# Altium PCB Pcb1.PcbDoc
Units mm, origin at the board's own origin, x right, y up, seen from the top; angles counter-clockwise.
Board outline 21.82 x 37.52 mm, 2 copper layers (Top Layer, Bottom Layer), stack 1.569 mm thick; 24 components, 18 nets, 68 pads, 72 vias.
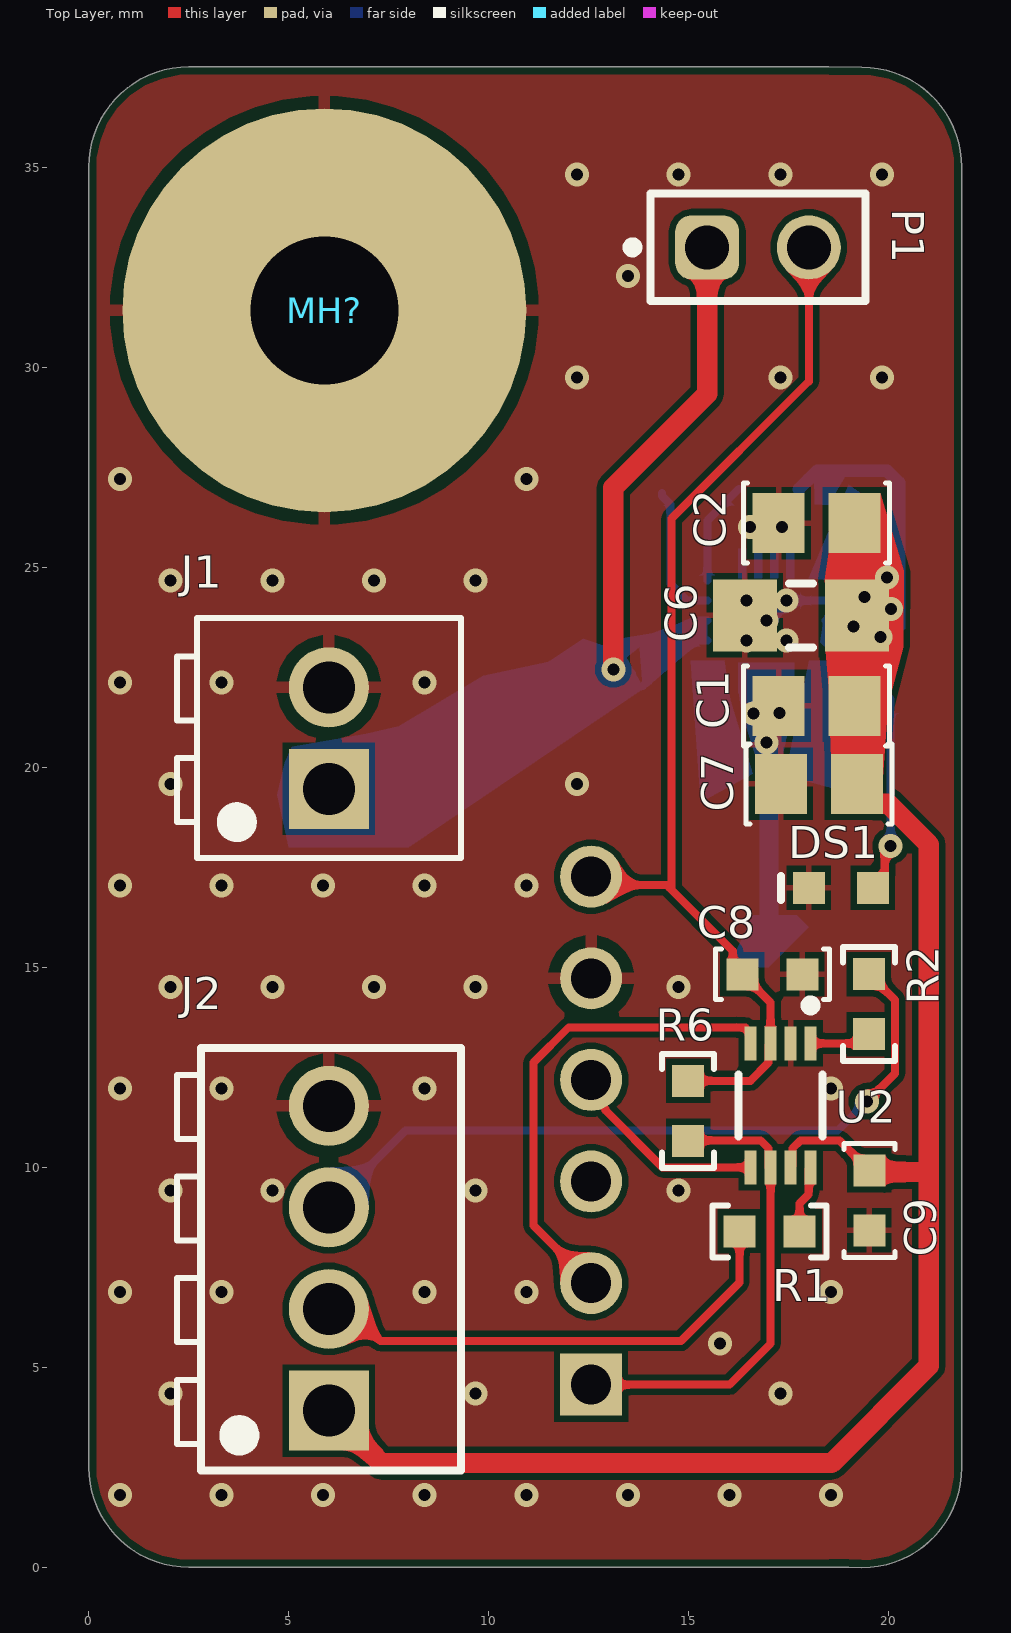
[diagram p0: Top Layer view]
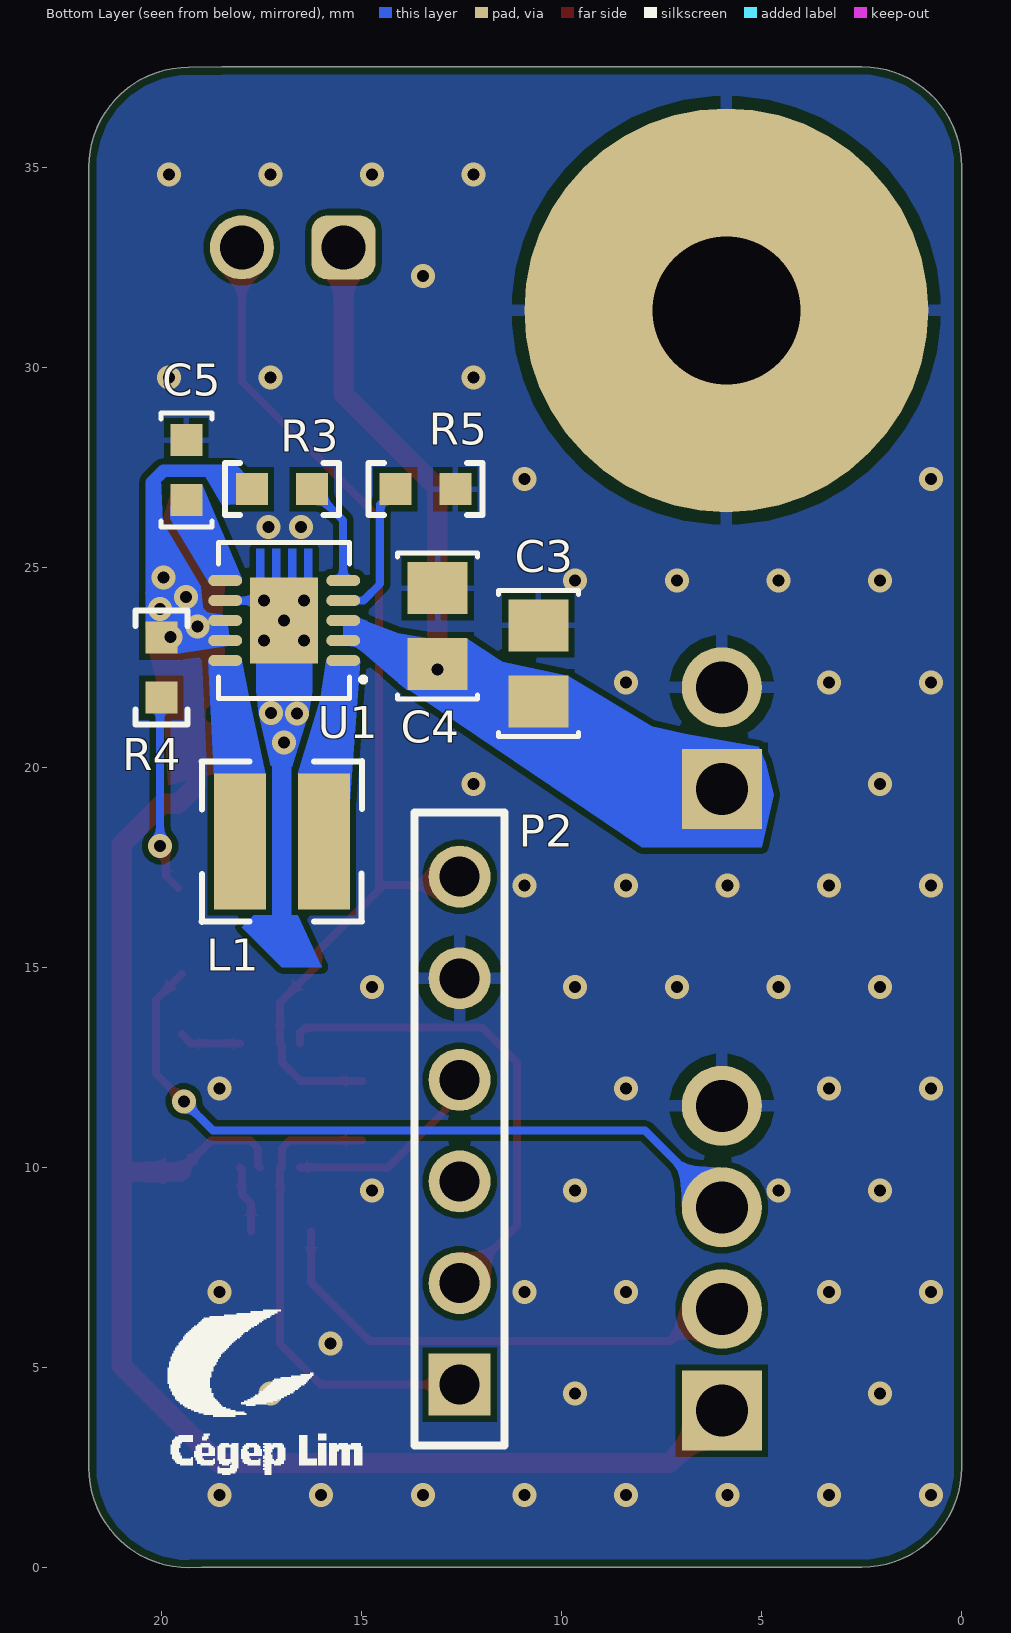
[diagram p1: Bottom Layer view, seen from below]
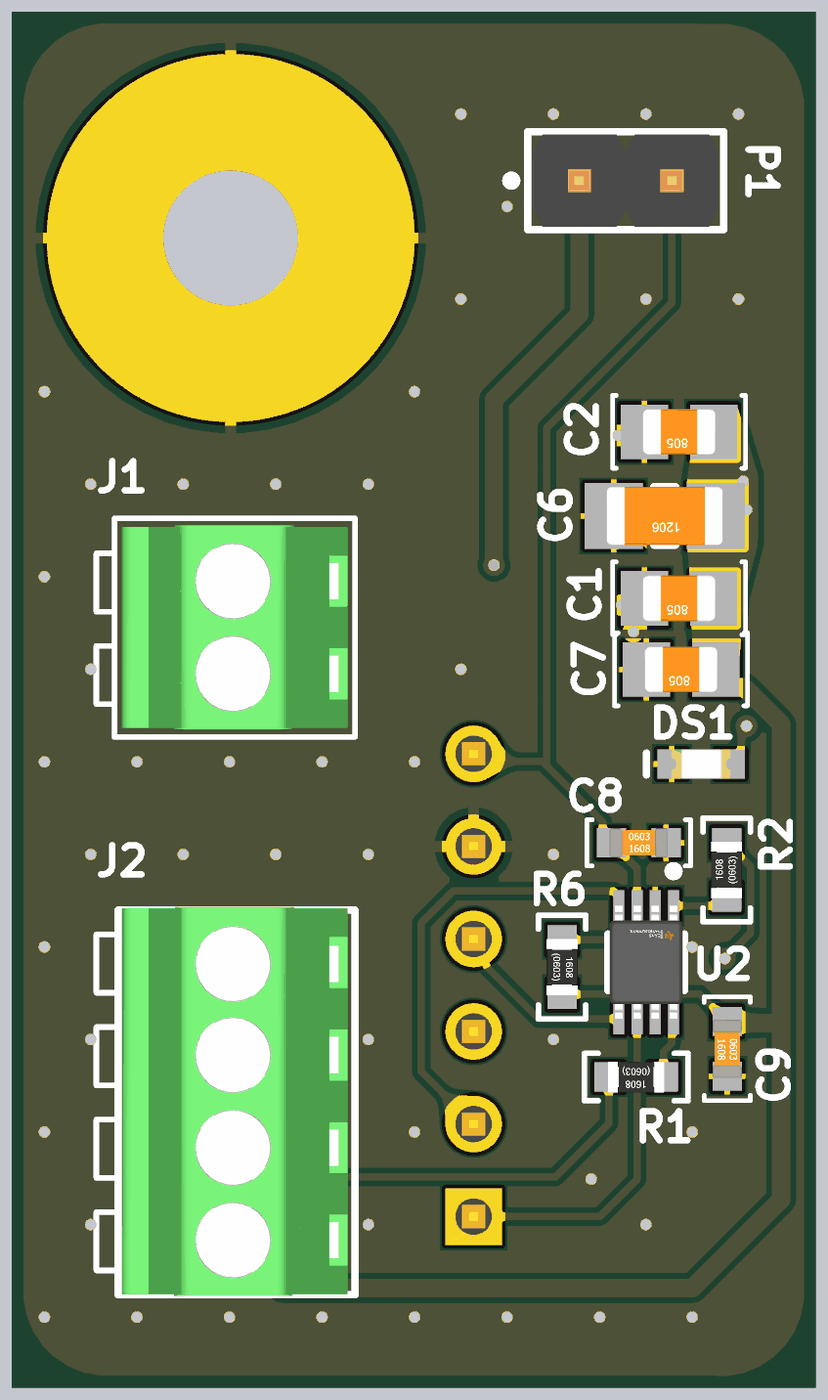
[diagram p2: 3D render of the assembled board from above, using the file's embedded part models]
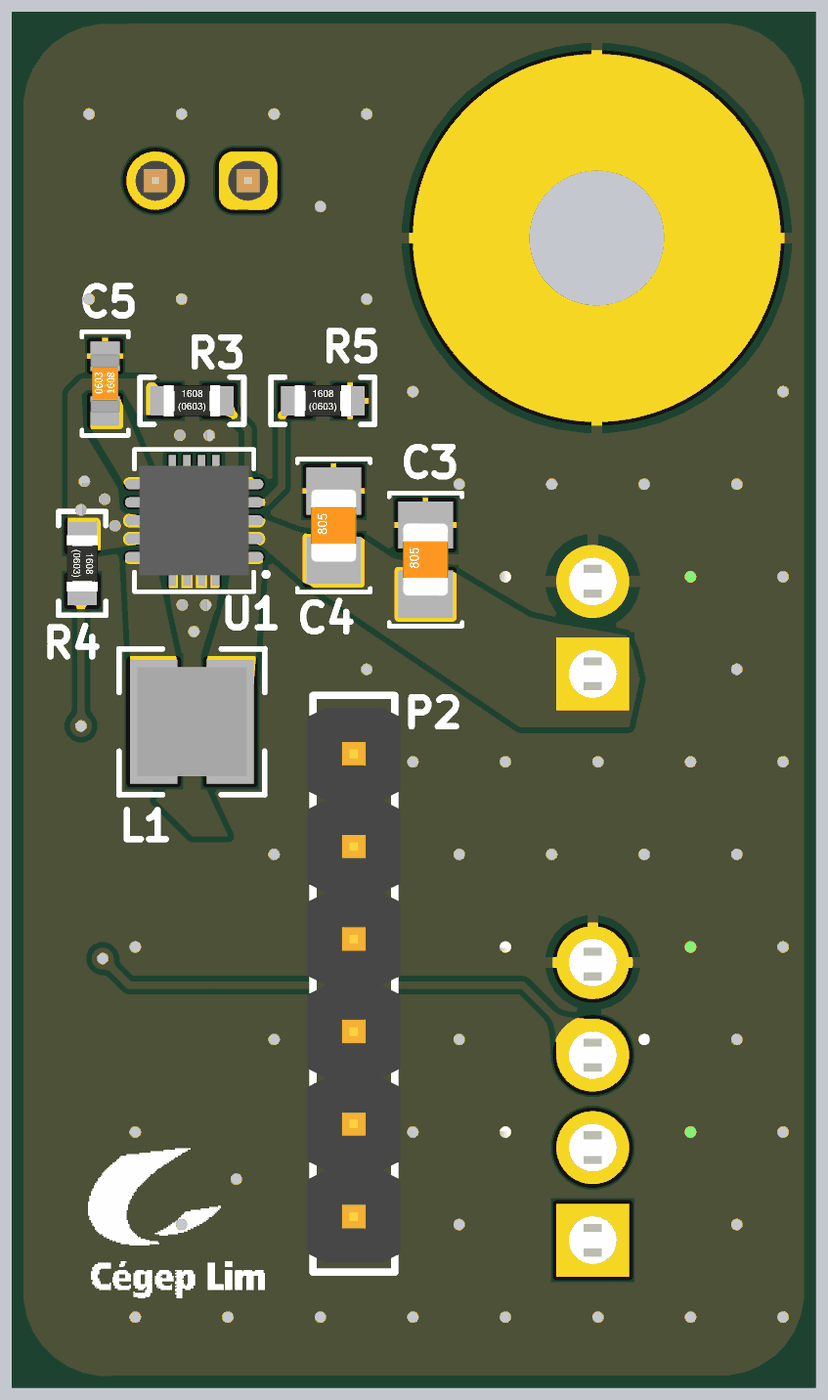
[diagram p3: 3D render of the assembled board from below, using the file's embedded part models]

## Layer stack, top to bottom
Top Solder: solder mask 0.0254, SM-001, Dk 4
Top Layer: signal copper 0.035
Dielectric 1: core 1.4986, Core-043, Dk 4.3
Bottom Layer: signal copper 0.035
Bottom Solder: solder mask 0.0254, SM-001, Dk 4

## Board outline
2.5,0.003 cw(c2.5,2.503) 0,2.503 0,35.014 cw(c2.5,35.014) 2.5,37.514 18.5,37.514 19.325,37.503 cw(c19.325,35.003) 21.825,35.003 21.825,2.492 cw(c19.325,2.492) 19.325,-0.008 19,0 18.5,0.003

## Design rules (kind name [scope] priority, off if disabled: settings)
BoardOutlineClearance [All] p1: gap=0.2 ignorepadtopadclearanceinfootprint=FALSE
Clearance [All] p1: gap=0.15 ignorepadtopadclearanceinfootprint=FALSE
DiffPairsRouting [All] p1: maxlimit=0.125 minlimit=0.125 mostfreqgap=0.125 toplayer_minwidth=0.125 toplayer_maxwidth=0.125 toplayer_prefwidth=0.125 bottomlayer_minwidth=0.125 bottomlayer_maxwidth=0.125 bottomlayer_prefwidth=0.125 maxuncoupledlength=15
HoleSize [All] p1: absolutevalues=TRUE maxlimit=5 minlimit=0.2 maxpercent=80.000 minpercent=20.000
HoleToHoleClearance [All] p1: gap=0.3 allowstackedmicrovias=TRUE
MinimumSolderMaskSliver [All] p1: minsoldermaskwidth=0.005
PlaneClearance [All] p1: clearance=0.5
PlaneConnect [All] p1: pad.planeconnectstyle=Relief pad.reliefexpansion=0.508 pad.reliefentries=4 pad.reliefconductorwidth=0.254 pad.reliefairgap=0.15 via.planeconnectstyle=Direct via.reliefexpansion=0.508 via.reliefentries=4 via.reliefconductorwidth=0.254 via.reliefairgap=0.254
PolygonConnect [All] p1: thpad.connectstyle=Relief thpad.reliefconductorwidth=0.3 thpad.reliefentries=4 thpad.polygonreliefangle="90 Angle" thpad.airgapwidth=0.3 smdpad.connectstyle=Relief smdpad.reliefconductorwidth=0.15 smdpad.reliefentries=4 smdpad.polygonreliefangle="90 Angle" smdpad.airgapwidth=0.15 via.connectstyle=Direct via.reliefconductorwidth=0.254 via.reliefentries=4 via.polygonreliefangle="90 Angle" via.airgapwidth=0.254
RoutingVias [All] p1: holewidth=0.3 width=0.6 viastyle="Through Hole" minholewidth=0.3 minwidth=0.6 maxholewidth=0.7 maxwidth=1.2
SilkToSilkClearance [All] p1: silktosilkclearance=0
SilkToSolderMaskClearance [IsPad] p1: minsilkscreentomaskgap=0 clearancetoexposedcopper=TRUE
SolderMaskExpansion [All] p1: expansion=0.102 istentingtop=FALSE
Width [All] p1: maxlimit=5 minlimit=0.15 preferedwidth=0.2
22 further rules are at their usual default settings.

## Classes and differential pairs
component class U_PMOD-Type2-SPI: P2
component class U_Level-Translator: C8 C9 R6 U2
component class U_Buck-Boost-5V: C3 C4 C5 C6 C7 DS1 L1 R3 R4 R5 U1
component class BUS: C1 C2 J1 J2 MH? P1 R1 R2

## Components (designator, comment, footprint, x,y, rotation, side; value= is the part's Value field where it differs from the comment)
C1 "CAP CER 10uF 10V X?? 0805" C_2012[0805] 18.194,21.536 r180 top value=10u
C2 "CAP CER 100nF 50V 0805" C_2012[0805] 18.194,26.105 r180 top locked value=100n
C3 "CAP CER 10uF 10V X?? 0805" C_2012[0805] 10.588,22.599 r90 bottom locked value=10u
C4 "CAP CER 10uF 10V X?? 0805" C_2012[0805] 13.108,23.532 r90 bottom locked value=10u
C5 "CAP CER 100nF 50V 0603" C_1608[0603] 19.384,27.43 r90 bottom value=100n
C6 "CAP CER 100uF 10V 1206" C_3216[1206] 17.801,23.797 r180 top value=100u
C7 "CAP CER 10uF 10V X?? 0805" C_2012[0805] 18.249,19.586 r180 top value=10u
C8 "CAP CER 100nF 50V 0603" C_1608[0603] 17.089,14.826 r0 top value=100n
C9 "CAP CER 100nF 50V 0603" C_1608[0603] 19.515,9.173 r270 top value=100n
DS1 "XL-1608UGC-04" D_LED_0603 18.801,16.989 r0 top value=Green
J1 "CONN-2MM54-2POS-TERM-BLOCK" CONN_TERM_BLOCK_2POS_100MIL 6,20.73 r90 top locked
J2 "CONN-2MM54-4POS-TERM-BLOCK" CONN_TERM_BLOCK_4POS_100MIL 6,7.73 r90 top locked
L1 "Inductor 1UH 1.6A 51mΩ SMD" L_3030[1212] 17,18.147 r0 bottom value=1u
MH? "DNP" MP_M-Hole_#4-40_LOOSE-FIT 5.888,31.426 r0 top
P1 "61300211121" CONN_HDR_2POS_100MILS_TH 16.73,33 r0 top
P2 "ZX-PZ2.54-1-6PZZ" CONN_HDR_01X06_100MIL 12.557,10.918 r90 bottom locked
R1 "Res 100R 1% 0603" R_1608[0603] 17.018,8.399 r180 top value=100R
R2 "Res 100R 1% 0603" R_1608[0603] 19.501,14.082 r90 top value=100R
R3 "Res 100k 1% 0603" R_1608[0603] 17,26.956 r180 bottom value=100k
R4 "Res 1k 1% 0603" R_1608[0603] 20.012,22.493 r270 bottom value=1k
R5 "Res 100k 1% 0603" R_1608[0603] 13.409,26.956 r180 bottom value=100k
R6 "Res 100k 1% 0603" R_1608[0603] 14.984,11.416 r270 top value=100k
U1 "TPS63061DSCR" U_WSON50P300X300X80-10N 16.941,23.671 r270 bottom locked
U2 "TXU0102DCUR" U_VSSOP50P310X200X90-8N 17.292,11.548 r90 top

## Footprints (in the part's own frame and the unit in brackets; to place one, negate y for a bottom-side part, rotate by r counter-clockwise, add the part's x,y. Pads: shape width x height; smd on the part's side, far side on the other; paste and mask are expansions set on the pad)
C_1608[0603] [mm] "Capacitor MLCC; Body 1.6 x 0.8 mm (LxW typ)"
  rect 0.8x0.8 smd: 1(-0.75,0) 2(0.75,0)
  silkscreen extent -1.43,-0.64 1.43,0.64, body extent -0.8,-0.4 0.8,0.4, height 0.8
C_2012[0805] [mm] "Capacitor MLCC; Body 2.0 x 1.3 mm (LxW typ)"
  rect 1.3x1.5 smd: 1(-0.95,0) 2(0.95,0)
  silkscreen extent -1.83,-1 1.83,1, body extent -1,-0.62 1,0.63, height 0.78
C_3216[1206] [mm] "Capacitor MLCC; Body 3.2 x 1.6 mm (LxW typ)"
  rect 1.6x1.8 smd: 1(-1.4,0) 2(1.4,0)
  silkscreen extent -0.3,-0.8 0.3,0.8, body extent -1.6,-0.8 1.6,0.8, height 1
CONN_HDR_01X06_100MIL [mm] "Header, 1x6 Pins, 2.54mm Pitch"
  rect 1.55x1.55 hole 1: 1(-6.35,0)
  round 1.55 hole 1: 2(-3.81,0) 3(-1.27,0) 4(1.27,0) 5(3.81,0) 6(6.35,0)
  silkscreen extent -7.87,-1.12 7.95,1.12, body extent -7.62,-1.27 7.62,1.27, height 8.57
CONN_HDR_2POS_100MILS_TH [mm] "Pin Header, pitch 2.54 mm, THT, Vertical, single row, 2p"
  rrect50% 1.6x1.6 hole 1.1: 1(-1.27,0)
  round 1.6 hole 1.1: 2(1.27,0)
  silkscreen extent -3.26,-1.35 2.69,1.35, body extent -2.54,-1.27 2.54,1.27, height 8.57
CONN_TERM_BLOCK_2POS_100MIL [mm] "2.54 mm Horizontal Entry Modular, 2 positions"
  rect 2x2 hole 1.3 paste-2539.97 mask+0: 1(-1.27,0)
  round 2 hole 1.3 paste-2539.97 mask+0: 2(1.27,0)
  silkscreen extent -3,-3.3 3,3.8, body extent -2.79,-3.1 2.81,3.1, height 8.53
CONN_TERM_BLOCK_4POS_100MIL [mm] "2.54 mm Horizontal Entry Modular, 4 positions"
  rect 2x2 hole 1.3: 1(-3.81,0)
  round 2 hole 1.3: 2(-1.27,0) 3(1.27,0) 4(3.81,0)
  silkscreen extent -5.31,-3.3 5.25,3.8, body extent -5.34,-3.1 5.34,3.1, height 8.5
D_LED_0603 [mm] "Chip LED, 2-Leads, Body 1.6x0.8mm, IPC Medium Density"
  rect 0.8x0.8 smd: 1(-0.8,0) 2(0.8,0)
  silkscreen extent -1.5,-0.3 -1.5,0.3, body extent -0.8,-0.4 0.8,0.4, height 0.7
L_3030[1212] [mm] "Inductor, 2-Leads, Body 3,00x3,00mm"
  rect 1.3x3.4 smd: 1(-1.05,0) 2(1.05,0)
  silkscreen extent -2.01,-2.01 2.01,2.01, body extent -1.5,-1.5 1.5,1.5, height 1.5
MP_M-Hole_#4-40_LOOSE-FIT [mm] "Monting Hole #4-40 Loose Fit"
  round 10.1 hole 3.7 paste-2539.97: 1(0,0)
R_1608[0603] [mm] "Chip Resistor; Body 1.6 x 0.8 mm (LxW typ)"
  rect 0.8x0.8 smd: 1(-0.75,0) 2(0.75,0)
  silkscreen extent -1.43,-0.65 1.43,0.65, body extent -0.77,-0.42 0.78,0.43, height 0.45
U_VSSOP50P310X200X90-8N [mm]
  rect 0.85x0.3 smd: 1(1.55,-0.75) 2(1.55,-0.25) 3(1.55,0.25) 4(1.55,0.75) 5(-1.55,0.75) 6(-1.55,0.25) 7(-1.55,-0.25) 8(-1.55,-0.75)
  silkscreen extent -0.78,-1.05 2.62,1.05, body extent -2.05,-1.3 2.05,1.3, height 0.25
U_WSON50P300X300X80-10N [mm]
  oval 0.28x0.85 smd paste+0 mask+0.051: 1(1,1.475) 2(0.5,1.475) 3(0,1.475) 4(-0.5,1.475) 5(-1,1.475) 6(-1,-1.475) 7(-0.5,-1.475) 8(0,-1.475) 9(0.5,-1.475) 10(1,-1.475)
  rect 2.15x1.7 smd paste-1.062 mask+0.051: 11(0,0)
  Top Layer region: -1.8,-0.3 -1.06,-0.3 -1.06,-0.1 -1.8,-0.1
  Top Layer region: -1.06,0.3 -1.8,0.3 -1.8,0.1 -1.06,0.1
  Top Layer region: -1.8,-0.7 -1.06,-0.7 -1.06,-0.5 -1.8,-0.5
  Top Layer region: 1.8,0.3 1.06,0.3 1.06,0.1 1.8,0.1
  Top Layer region: 1.06,-0.7 1.8,-0.7 1.8,-0.5 1.06,-0.5
  Top Layer region: 1.06,-0.3 1.8,-0.3 1.8,-0.1 1.06,-0.1
  Top Layer region: -1.06,0.7 -1.8,0.7 -1.8,0.5 -1.06,0.5
  Top Layer region: 1.8,0.7 1.06,0.7 1.06,0.5 1.8,0.5
  silkscreen extent -1.95,-1.64 1.95,2.04, body extent -1.5,-1.5 1.5,1.5, height 0.77

## Part data
C1 C3 C4 C7: library part CAP026, "Capacitor type 1", Rated Voltage=10V, Code CEGEP=KCOND94SM, LibRef=CAP026, Localisation=R13-C015-3, Mounting Technology=SMT
C2: library part CAP008, "Capacitor type 1", Dielectric=X7R, Manufacturer 1=Yageo, Manufacturer Part Number 1=CC0805KRX7R9BB104, Rated Voltage=50V, Supplier Part Number 1=C49678, Tolerance=10%, Code CEGEP=KCOND0142SM, LibRef=CAP008, Mounting Technology=SMT, Supplier 1=LCSC
C5 C8 C9: library part CAP002, "Capacitor type 1", Dielectric=X7R, Manufacturer 1=Yageo, Manufacturer Part Number 1=CC0603KRX7R9BB104, Rated Voltage=50V, Supplier Part Number 1=C14663, Tolerance=10%, Code CEGEP=COND0143SM, LibRef=CAP002, Mounting Technology=SMT, Supplier 1=LCSC
C6: library part CAP005, "Capacitor type 1", Dielectric=X5R, Manufacturer 1=Murata, Manufacturer Part Number 1=GRM31CR61A107MEA8L, Rated Voltage=10V, Supplier Part Number 1=C883598, Tolerance=20%, Code CEGEP=KCOND04SM, LibRef=CAP005, Mounting Technology=SMT, Supplier 1=LCSC
DS1: library part D_LED_GREEN_0603, "LED Green Clear 40mcd 140deg", Manufacturer 1=XINGLIGHT, Manufacturer 2=Wurth, Manufacturer Part Number 2=150060VS75000, Supplier Part Number 1=C965804, Code CEGEP=KLEDVC0603, Manufacturer Part Number 1=XL-1608UGC-04, Mounting Technology=SMT, Supplier 1=LCSC, Supplier 2=Digikey, Supplier Part Number 2=732-4980-1-ND
J1: "CONN TERM BLOCK 2POS 100mil pitch", Manufacturer 1=Dorabo, Manufacturer 2=Amphenol, Manufacturer Part Number 1=DB125-2.54-2P-GN-S, Manufacturer Part Number 2=VN02A1500000G, Supplier Part Number 1=C918120, Mounting Technology=TH, Supplier 1=LCSC, Supplier 2=Digikey, Supplier Part Number 2=VN02A1500000G-ND
J2: "CONN TERM BLOCK 4POS 100mil pitch", Manufacturer 1=Dorabo, Manufacturer 2=Amphenol, Manufacturer Part Number 1=DB125-2.54-4P-GN-S, Manufacturer Part Number 2=VN04A1500000G, Supplier Part Number 1=C918122, Mounting Technology=TH, Supplier 1=LCSC, Supplier 2=Digikey, Supplier Part Number 2=VN04A1500000G-ND
L1: library part IND001, "Inductor type 1", Manufacturer 1=Murata, Manufacturer Part Number 1=LQH3NPN1R0MMEL, Saturation Current=2.35A, Supplier Part Number 1=C703777, Tolerance=25%, Code CEGEP=KPTSO09, DCR=0R025, LibRef=IND001, Mounting Technology=SMT, Supplier 1=LCSC
MH?: library part MH-4-40, "Mounting Hole #4-40 w/ Flat Washer", Supplier Part Number 1=N/A, Manufacturer Part Number 1=DNP
P1: library part CONN-100MIL-HDR-01X02, "CONN HEADER 2POS 100MIL", Manufacturer 1=Megastar, Manufacturer 2="Würth Elektronik", Manufacturer Part Number 1=ZX-PZ2.54-1-2PZZ, Supplier Part Number 1=C7501260, Manufacturer Part Number 2=61300211121, Mounting Technology=TH, Supplier 1=LCSC
P2: library part CONN-100MIL-HDR-01X06, "Conn. Header 6pos 100mils", Manufacturer 1=Megastar, Manufacturer 2="Würth Elektronik", Manufacturer Part Number 2=61300611121, Supplier Part Number 1=C7501264, Manufacturer Part Number 1=ZX-PZ2.54-1-6PZZ, Mounting Technology=TH, Supplier 1=LCSC, Supplier 2=Digikey, Supplier Part Number 2=732-5319-ND
R1 R2: library part RES029, "Resistor type 1", Manufacturer 1=Yageo, Manufacturer Part Number 1=RC0603FR-07100RL, Max Working Voltage=75V, Supplier Part Number 1=C105588, Tolerance=1%, LibRef=RES029, Mounting Technology=SMT, Puissance=1/10W, Supplier 1=LCSC
R3 R5 R6: library part RES002, "Resistor type 1", Manufacturer 1=Yageo, Manufacturer Part Number 1=RC0603FR-07100KL, Max Working Voltage=75V, Supplier Part Number 1=C14675, Tolerance=1%, LibRef=RES002, Mounting Technology=SMT, Puissance=1/10W, Supplier 1=LCSC
R4: library part RES015, "Resistor type 1", Manufacturer 1=Yageo, Manufacturer Part Number 1=RC0603FR-071KL, Max Working Voltage=75V, Supplier Part Number 1=C22548, Tolerance=1%, LibRef=RES015, Mounting Technology=SMT, Puissance=1/10W, Supplier 1=LCSC
U1: library part U_TPS63061DSC, "IC REG BUCK BOOST 5V 2A 10WSON", Manufacturer 1=TI, Supplier Part Number 1=C2876326, Manufacturer Part Number 1=TPS63061DSCR, Mounting Technology=SMT, Supplier 1=LCSC, Supplier 2=Digikey, Supplier Part Number 2=296-30205-1-ND
U2: library part U_TXU0102DCU, "Two channel fixed-direction level shifter 8-VSSOP", Manufacturer 1=TI, Supplier Part Number 1=C5217871, Manufacturer Part Number 1=TXU0102DCUR, Mounting Technology=SMT, Supplier 1=LCSC, Supplier 2=Digikey, Supplier Part Number 2=296-TXU0102DCURCT-ND

## Via types
v1: diameter 0.6, hole 0.3, Top Layer to Bottom Layer, tented both sides, 67 vias
v2: diameter 0.6, hole 0.3, Top Layer to Bottom Layer, tented top, 5 vias

## Nets (pads, with @x,y where several pads share a name; then routed paths per layer and width w, separated by ;. In a path a pad name is that pad's centre, name@x,y a point inside that pad or via, vN(x,y) a via of type N, cw(c..) or ccw(c..) an arc to the next point about the centre after c; other vN are vias at no path point)
CLOCK_1: J2.2 R1.2 | length 12.5
  Top Layer w0.2: J2.2 6.487,6.46 7.291,5.656 14.805,5.656 16.268,7.12 R1.2
DATA_1: J2.3 R2.2 | length 18.3
  Top Layer w0.2: v1(19.45,11.649) 20.151,12.351 20.151,14.182 R2.2
  Bottom Layer w0.2: J2.3 7.919,10.919 18.721,10.919 v1(19.45,11.649) v1(19.45,11.649)
GND: C1.2 C2.2 C3.2 C4.2 C5.2 C6.2 C7.2 C8.2 C9.2 DS1.1 J1.2 J2.4 MH?.1 P2.5 R5.2 U1.7 U1.11 U2.2 | length 5.8
  Bottom Layer w0.2: v2(16.941,23.671) 17.691,24.171 U1.7 ; 17,16 17.003,16.003
  Bottom Layer w0.483: 17.003,16.003 17.003,20.168
  other v1: 0.776,1.808 3.316,1.808 5.856,1.808 8.396,1.808 10.936,1.808 13.476,1.808 16.016,1.808 18.556,1.808 2.046,4.348 9.666,4.348 17.286,4.348 15.784,5.596 0.776,6.888 3.316,6.888 8.396,6.888 10.936,6.888 18.556,6.888 2.046,9.428 4.586,9.428 9.666,9.428 14.746,9.428 0.776,11.968 3.316,11.968 8.396,11.968 18.556,11.968 2.046,14.508 4.586,14.508 7.126,14.508 9.666,14.508 14.746,14.508 0.776,17.048 3.316,17.048 5.856,17.048 8.396,17.048 10.936,17.048 2.046,19.588 12.206,19.588 16.946,20.625 16.623,21.351 17.267,21.356 0.776,22.128 3.316,22.128 8.396,22.128 2.046,24.668 4.586,24.668 7.126,24.668 9.666,24.668 16.525,26.006 17.331,26.011 0.776,27.208 10.936,27.208 12.206,29.748 17.286,29.748 19.826,29.748 13.476,32.288 12.206,34.828 14.746,34.828 17.286,34.828 19.826,34.828
  other v2: 16.441,23.171 17.441,23.171 16.441,24.171 17.441,24.171
In_A_1: P2.4 U2.5 | length 5.1
  Top Layer w0.2: P2.4 12.815,11.93 12.815,11.564 12.916,11.463 12.916,11.427 14.346,9.998 U2.5
In_A_2: P2.2 U2.4 | length 12.2
  Top Layer w0.2: P2.2 11.116,8.549 11.116,12.62 11.998,13.503 16.413,13.503 16.542,13.373 U2.4
MISO: P2.3
NetC5_1: C5.1 U1.6
NetDS1_2: DS1.2 R4.2 | length 5
  Top Layer w0.2: DS1.2 19.901,17.289 19.901,17.78 20.046,17.924 v1(20.046,18.033)
  Bottom Layer w0.2: R4.2 20.046,21.71 v1(20.046,18.033)
NetL1_1: L1.1 U1.1
NetL1_2: L1.2 U1.10
NetR3_2: R3.2 U1.5 | length 2.6
  Bottom Layer w0.2: U1.5 15.466,26.172 R3.2
NetR5_1: R5.1 U1.4 | length 3.5
  Bottom Layer w0.2: R5.1@14.333,26.858 14.333,26.782 14.541,26.574 14.541,24.592 14.961,24.173 15.464,24.173 U1.4
OE: P2.1 R6.2 U2.6 | length 11.9
  Top Layer w0.2: P2.1 16.02,4.568 17.043,5.591 U2.6 ; R6.2@14.991,10.673 16.796,10.673 16.992,10.477 16.992,10.006 U2.6@17,9.998
Out_B_1: R1.1 U2.8 | length 1.7
  Top Layer w0.2: R1.1 17.768,9.099 17.992,9.323 17.992,9.948 U2.8
Out_B_2: R2.1 U2.1 | length 1.6
  Top Layer w0.2: U2.1 19.268,13.098 R2.1
V_3V3: C8.1 P1.2 P2.6 R6.1 U2.3 | length 27.1
  Top Layer w0.2: P2.6 12.765,17.059 14.565,17.059 ; 14.519,16.989 16.099,15.409 16.099,15.066 C8.1 ; 14.565,16.989 14.565,26.219 18,29.653 P1.2 ; R6.1 16.538,12.166 16.992,12.62 16.992,13.048 U2.3 17.042,14.123 C8.1@16.375,14.79
V_5Vext: C1.1 C2.1 C6.1 C7.1 C9.1 J2.1 R3.1 R4.1 U1.8 U1.9 U2.7 | length 46.5
  Top Layer w0.2: U2.7 17.592,10.048 17.592,10.477 17.789,10.673 18.765,10.673 C9.1
  Top Layer w0.508: J2.1 7.311,2.609 18.569,2.609 21,5.04 21,9.884 ; C1.1 19.144,19.541 19.595,19.09 19.984,19.09 21,18.074 21,9.884 ; C9.1 19.554,9.884 21,9.884
  Bottom Layer w0.2: R3.1@18.137,27.343 18.211,27.417 ; U1.8 20.137,23.671 v1@20.254,23.788
  Bottom Layer w0.318: R3.1@17.753,26.956 17.753,26.96 17.991,27.198 17.995,27.198 18.214,27.417 ; 18.211,27.417 19.956,27.417 20.254,27.12 v1@20.254,23.788
  other v1: 19.789,23.26 19.113,23.528 20.049,23.965 19.396,24.257 19.954,24.749
V_IN: C3.1 C4.1 J1.1 P1.1 U1.2 U1.3 | length 16.7
  Top Layer w0.508: v1(13.114,22.449) 13.114,26.99 15.46,29.337 P1.1
  Bottom Layer w0.2: C4.1 13.178,22.651 13.758,23.132 15.181,23.671 U1.3 ; v1(13.114,22.449) C4.1@13.178,22.513 ; C4.1@13.247,22.582 13.264,22.582 C4.1@13.575,22.35 ; C4.1@13.851,22.032 14.925,22.965 cw(c15.181,22.671) 14.937,22.975 15.181,23.171 U1.2

## Polygon pours and split planes (outlines as drawn)
GND on Top Layer "GND_L01_P004" (solid, remove dead copper, pour order 4): 2.5,0.003 cw(c2.5,2.503) 0,2.503 0,35.014 cw(c2.5,35.014) 2.5,37.514 18.5,37.514 19.325,37.503 cw(c19.325,35.003) 21.825,35.003 21.825,2.492 cw(c19.325,2.492) 19.325,-0.008 19,0 18.5,0.003
GND on Bottom Layer "GND_L02_P005" (solid, remove dead copper, pour order 5): 2.5,0.003 cw(c2.5,2.503) 0,2.503 0,35.014 cw(c2.5,35.014) 2.5,37.514 18.5,37.514 19.325,37.503 cw(c19.325,35.003) 21.825,35.003 21.825,2.492 cw(c19.325,2.492) 19.325,-0.008 19,0 18.5,0.003

## Other copper
Top Layer:
  region net V_5Vext: 18.399,24.678 18.5,23.751 18.422,22.91 18.526,21.699 19.803,20.882 20.357,23.002 20.369,24.912 19.783,26.847 18.537,25.614 18.5,25.365
  region net V_5Vext: 18.533,20.905 18.576,19.86 19.835,19.55 20.006,22.041
Bottom Layer:
  region net GND: 16.604,16.297 17.703,16.297 18,16 17,15 16,15
  region net GND: 16.245,21.876 16.322,21.366 16.718,20.114 16.734,20.011 17.283,20.035 17.576,21.338 17.641,21.91 17.641,22.611 16.341,22.611
  region net NetL1_1: 15.886,22.673 16.042,21.692 16.596,19.841 15.304,19.131 15.045,22.668
  region net V_5Vext: 18.386,23.801 18.969,23.895 19.023,24.533 19.975,26.127 20.029,27.228 20.19,27.201 20.313,25.632 20.405,24.469 20.405,23.468 19.617,22.838 18.386,23.028 18.291,23.123
  region net V_IN: 5.077,20.521 4.902,20.121 4.706,19.316 5,18
  region net V_IN: 8,18 13.939,22.016 11.494,22.635 9.858,22.289 7.749,21.031 6.931,20.836 5.077,20.521 5,18
  region net V_5Vext: 18.145,26.575 18.49,26.557 18.949,27.342 18.168,27.386 18.137,27.343
  region net V_5Vext: 19.123,24.153 18.795,23.807 19.276,23.671
  region net NetL1_2: 18.006,22.672 17.802,21.653 17.408,19.807 18.673,19.447 18.834,22.667
  region net NetC5_1: 18.992,27.066 18.528,25.969 18.001,24.724 18.839,24.646 19.787,26.222 19.787,26.51
  region net V_IN: 14.25,23.378 13.013,23.178 13.108,22.582
  region net V_IN: 12.366,23.215 10.769,22.162 11.302,20.991 13.89,21.948 13.181,23.207 13.215,22.99 13,23
  region net V_IN: 15.323,23.671 13.758,23.132 13.851,22.032 15.195,23.163 15.323,23.171 15.466,23.171 15.466,23.671

## Silkscreen, mask and mechanical layers (free items; w line width, h text height)
Bottom Overlay:
  drawing of 12 lines, arcs and shapes, not listed
Board:
  the board outline again, w0.254
Drill Drawing:
  circle w0.254: c73.284,64.154 r0.69
  lines w0.25: 71.343,53.224 160.856,53.224 ; 71.343,68.74 160.856,68.74 ; 79.324,50.121 79.324,71.843 ; 85.886,50.121 85.886,71.843 ; 100.32,50.121 100.32,71.843 ; 106.509,50.121 106.509,71.843 ; 115.441,22.258 121.717,22.258 137.726,22.258 146.684,22.258 153.805,22.258 ; 115.441,25.258 121.717,25.258 137.726,25.258 146.684,25.258 153.805,25.258 ; 115.441,28.258 121.717,28.258 137.726,28.258 146.684,28.258 153.805,28.258 ; 115.441,31.258 121.717,31.258 137.726,31.258 146.684,31.258 153.805,31.258 ; 115.441,34.258 121.717,34.258 137.726,34.258 146.684,34.258 153.805,34.258 ; 115.441,37.258 121.717,37.258 137.726,37.258 146.684,37.258 153.805,37.258 ; 115.441,40.258 121.717,40.258 137.726,40.258 146.684,40.258 153.805,40.258 ; 115.441,43.258 121.717,43.258 137.726,43.258 146.684,43.258 153.805,43.258 ; 115.441,46.258 153.805,46.258 ; 115.521,50.121 115.521,71.843 ; 121.717,49.258 121.717,19.258 ; 132.582,50.121 132.582,71.843 ; 137.726,49.258 137.726,19.258 ; 139.966,50.121 139.966,71.843 ; 146.684,49.258 146.684,19.258 ; 149.612,50.121 149.612,71.843 ; 121.717,19.258 137.726,19.258 ; 121.717,19.258 115.441,19.258 115.441,49.258 153.805,49.258 153.805,19.258 146.684,19.258 ; 137.726,19.258 146.684,19.258 ; 71.343,50.121 160.856,50.121 160.856,71.843 71.343,71.843 71.343,50.121
  lines w0.254: 72.595,54.155 73.284,54.5 73.974,54.155 73.629,54.845 73.974,55.534 73.284,55.19 72.595,55.534 72.94,54.845 72.595,54.155 ; 72.595,58.637 73.974,58.637 73.284,57.258 72.595,58.637 ; 72.595,60.361 73.974,60.361 73.974,61.74 72.595,61.74 72.595,60.361 ; 72.595,66.912 72.94,66.912 73.284,66.567 73.629,66.912 73.974,66.912 73.629,67.257 73.974,67.602 73.629,67.602 73.284,67.947 72.94,67.602 72.595,67.602 72.94,67.257 72.595,66.912
  text "Symbol" at 73.205,69.67 h1.8
  text "Count" at 80.255,69.67 h1.8
  text "Hole Size" at 86.817,69.67 h1.8
  text "Plated" at 101.251,69.67 h1.8
  text "Hole Type" at 107.44,69.67 h1.8
  text "Drill Layer Pair" at 116.451,69.67 h1.8
  text "Via/Pad" at 133.513,69.67 h1.8
  text "Pad Shape" at 140.897,69.67 h1.8
  text "Hole Length" at 150.543,69.67 h1.8
  text "72" at 80.255,66.567 h1.5
  text "0.300mm (11.81mil)" at 86.817,66.567 h1.5
  text "PTH" at 101.251,66.567 h1.5
  text "Round" at 107.44,66.567 h1.5
  text "Top Layer - Bottom Layer" at 116.451,66.567 h1.5
  text "Via" at 133.513,66.567 h1.5
  text "Rounded" at 140.897,66.567 h1.5
  text "-" at 150.543,66.567 h1.5
  text "6" at 80.255,63.464 h1.5
  text "1.000mm (39.37mil)" at 86.817,63.464 h1.5
  text "PTH" at 101.251,63.464 h1.5
  text "Round" at 107.44,63.464 h1.5
  text "Top Layer - Bottom Layer" at 116.451,63.464 h1.5
  text "Pad" at 133.513,63.464 h1.5
  text "(Mixed)" at 140.897,63.464 h1.5
  text "-" at 150.543,63.464 h1.5
  text "2" at 80.255,60.361 h1.5
  text "1.100mm (43.31mil)" at 86.817,60.361 h1.5
  text "PTH" at 101.251,60.361 h1.5
  text "Round" at 107.44,60.361 h1.5
  text "Top Layer - Bottom Layer" at 116.451,60.361 h1.5
  text "Pad" at 133.513,60.361 h1.5
  text "(Mixed)" at 140.897,60.361 h1.5
  text "-" at 150.543,60.361 h1.5
  text "6" at 80.255,57.258 h1.5
  text "1.300mm (51.18mil)" at 86.817,57.258 h1.5
  text "PTH" at 101.251,57.258 h1.5
  text "Round" at 107.44,57.258 h1.5
  text "Top Layer - Bottom Layer" at 116.451,57.258 h1.5
  text "Pad" at 133.513,57.258 h1.5
  text "(Mixed)" at 140.897,57.258 h1.5
  text "-" at 150.543,57.258 h1.5
  text "1" at 80.255,54.155 h1.5
  text "3.700mm (145.67mil)" at 86.817,54.155 h1.5
  text "PTH" at 101.251,54.155 h1.5
  text "Round" at 107.44,54.155 h1.5
  text "Top Layer - Bottom Layer" at 116.451,54.155 h1.5
  text "Pad" at 133.513,54.155 h1.5
  text "Rounded" at 140.897,54.155 h1.5
  text "-" at 150.543,54.155 h1.5
  text "87 Total" at 80.255,51.052 h1.5
  text "Layer" at 116.941,47.008 h1.5
  text "Name" at 123.217,47.008 h1.5
  text "Thickness" at 139.226,47.008 h1.5
  text "Gerber" at 148.184,47.008 h1.5
  text "Top Overlay" at 123.217,44.008 h1.5
  text "GTO" at 148.184,44.008 h1.5
  text "Top Solder" at 123.217,41.008 h1.5
  text "0.025mm" at 139.226,41.008 h1.5
  text "GTS" at 148.184,41.008 h1.5
  text "Top Surface Finish" at 123.217,38.008 h1.5
  text "0.020mm" at 139.226,38.008 h1.5
  text "1" at 116.941,35.008 h1.5
  text "Top Layer" at 123.217,35.008 h1.5
  text "0.035mm" at 139.226,35.008 h1.5
  text "GTL" at 148.184,35.008 h1.5
  text "Dielectric 1" at 123.217,32.008 h1.5
  text "1.499mm" at 139.226,32.008 h1.5
  text "2" at 116.94,29.008 h1.5
  text "Bottom Layer" at 123.217,29.008 h1.5
  text "0.035mm" at 139.226,29.008 h1.5
  text "GBL" at 148.184,29.008 h1.5
  text "Bottom Surface Finish" at 123.217,26.008 h1.5
  text "0.020mm" at 139.226,26.008 h1.5
  text "Bottom Solder" at 123.217,23.008 h1.5
  text "0.025mm" at 139.226,23.008 h1.5
  text "GBS" at 148.184,23.008 h1.5
  text "Bottom Overlay" at 123.217,20.008 h1.5
  text "GBO" at 148.184,20.008 h1.5
  text "Total board thickness:" at 116.941,17.008 h1.5
  text "1.659mm" at 139.226,17.008 h1.5